# Altium PCB Power_meter.PCBDOC (part 1 of 2)
Units mm, origin at the board's own origin, x right, y up, seen from the top; angles counter-clockwise.
Board outline 21.4 x 72.8 mm, 2 copper layers (Top, Bot), stack 1.621 mm thick; 101 components, 79 nets, 320 pads, 151 vias.
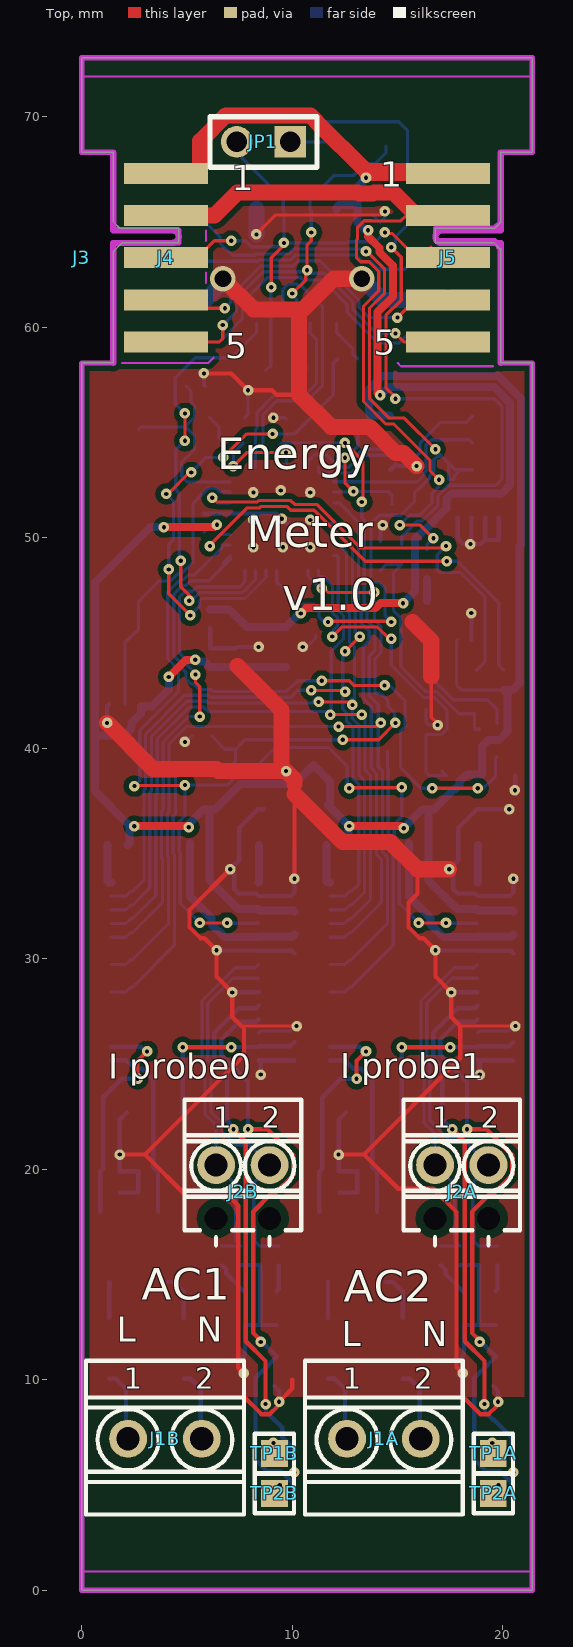
[diagram p0: Top view]
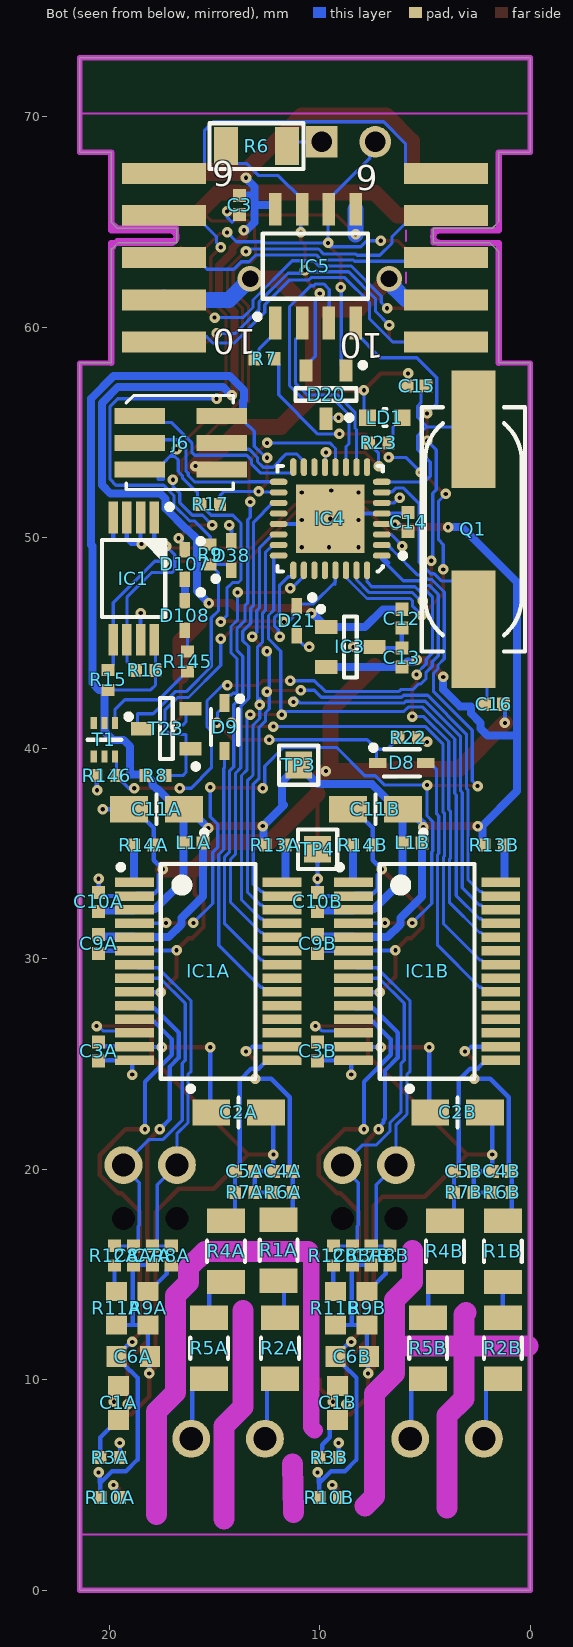
[diagram p1: Bot view, seen from below]
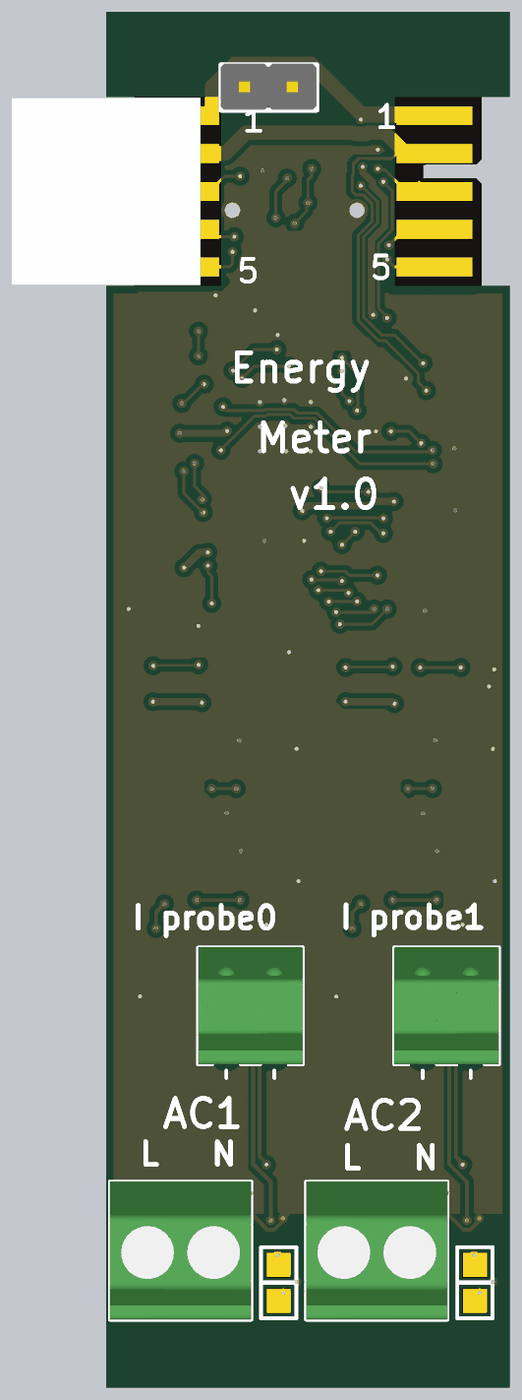
[diagram p3: 3D render of the assembled board from above, using the file's embedded part models]
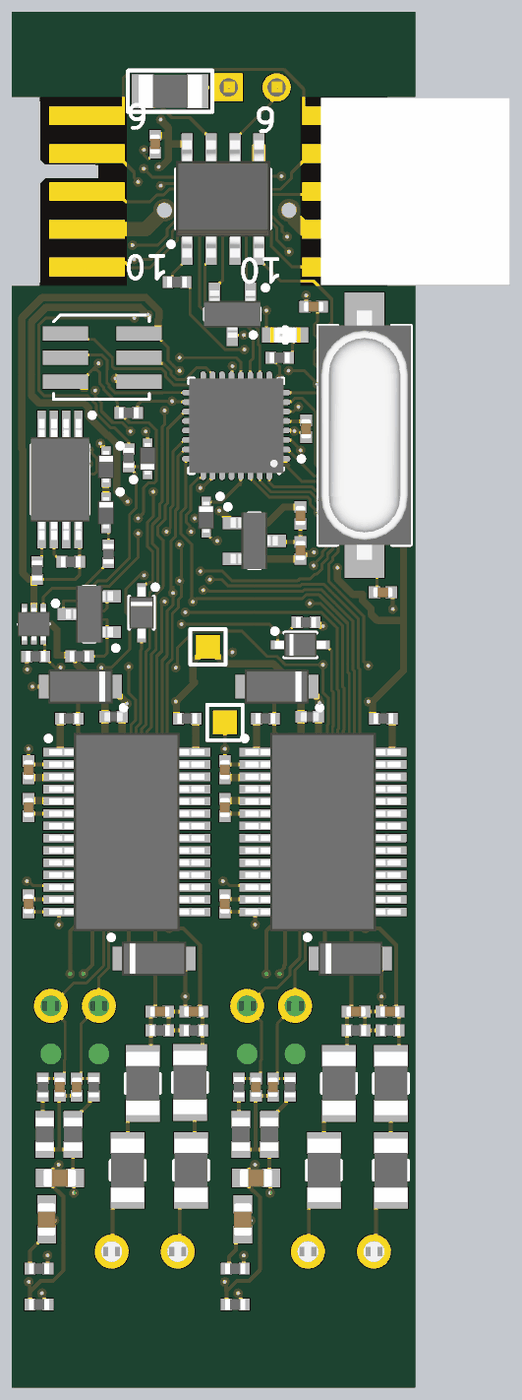
[diagram p4: 3D render of the assembled board from below, using the file's embedded part models]

## Layer stack, top to bottom
TopSolder: solder mask 0.0102, Solder Resist, Dk 3.5
Top: signal copper 0.0356
Dielectric1: core 1.55, FR-4, Dk 4.8
Bot: signal copper 0.0356
BottomSolder: solder mask 0.0102, Solder Resist, Dk 3.5

## Board outline
0,0 0,0.15 0,43.8 0,58.3 1.5,58.3 1.5,63.6 1.9,64 4.6,64 4.6,64.7 1.8,64.7 1.5,65 1.5,68.3 0,68.3 0,72.8 21.4,72.8 21.4,68.3 19.9,68.3 19.9,65 19.6,64.7 16.8,64.7 16.8,64 19.6,64 19.8,63.8 19.9,63.7 19.9,58.3 21.4,58.3 21.4,0

## Design rules (kind name [scope] priority, off if disabled: settings)
Clearance Clearance_DIFF [(InDifferentialPairClass('All Differential Pairs'))] p1: gap=0.127 ignorepadtopadclearanceinfootprint=FALSE except(0: Arc-Hole Track-Hole SMDPad-Hole THPad-Hole Via-Hole Fill-Hole Poly-Hole Region-Hole Text-Hole; 0.254: Arc-Poly Track-Poly SMDPad-Poly THPad-Poly Via-Poly Fill-Poly Poly-Poly Poly-Region Poly-Text)
Clearance [All] p2: gap=0.127 ignorepadtopadclearanceinfootprint=FALSE except(0: Arc-Hole Track-Hole SMDPad-Hole THPad-Hole Via-Hole Fill-Hole Poly-Hole Region-Hole Text-Hole; 0.254: Arc-Poly Track-Poly SMDPad-Poly Via-Poly; 0.381: THPad-Poly Fill-Poly Poly-Poly)
DiffPairsRouting [All] p1: maxlimit=0.254 minlimit=0.127 mostfreqgap=0.127 toplayer_minwidth=0.127 toplayer_maxwidth=0.381 toplayer_prefwidth=0.254 bottomlayer_minwidth=0.127 bottomlayer_maxwidth=0.381 bottomlayer_prefwidth=0.254 maxuncoupledlength=12.7
FabricationTestPointUsage TestPointUsage [All] p1: valid=0 allowmultiple=FALSE
FabricationTestpoint Testpoint [All] p1: side=3 testpointundercomponent=TRUE minsize=1.016 maxsize=2.54 preferedsize=1.524 minholesize=0.508 maxholesize=1.016 preferedholesize=0.813 testpointgrid=0.025 allowsidetop=TRUE allowsidebottom=TRUE usegrid=TRUE gridtolerance=0
HoleSize [All] p1: absolutevalues=TRUE maxlimit=3.81 minlimit=0.025 maxpercent=80.000 minpercent=20.000
HoleToHoleClearance [All] p1: gap=0.025 allowstackedmicrovias=TRUE
MinimumSolderMaskSliver [All] p1: minsoldermaskwidth=0
PlaneClearance [All] p1: clearance=0.254
PlaneConnect [All] p1: planeconnectstyle=Direct reliefexpansion=0.508 reliefentries=4 reliefconductorwidth=0.254 reliefairgap=0.254
PolygonConnect PolygonConnect_pad [(InPadClass('All Pads'))] p1: connectstyle=Relief reliefconductorwidth=0.254 reliefentries=4 polygonreliefangle="90 Angle" airgapwidth=0.254
PolygonConnect [All] p2: connectstyle=Direct reliefconductorwidth=0.254 reliefentries=4 polygonreliefangle="45 Angle" airgapwidth=0.254
RoomDefinition Power_meter [InComponentClass('Power_meter')] p1 off: confinementstyle=ConfineIn formatcopy=TRUE lockcomponents=FALSE outline 0.8,48.9 22,48.9 22,73.1 0.8,73.1
RoomDefinition U_Meas_Channel2 [InComponentClass('U_Meas_Channel2')] p2 off: confinementstyle=ConfineIn formatcopy=TRUE lockcomponents=FALSE outline 0.15,3.4 10.55,3.4 10.55,38.4 0.15,38.4
RoomDefinition U_Meas_Channel1 [InComponentClass('U_Meas_Channel1')] p3 off: confinementstyle=ConfineIn formatcopy=TRUE lockcomponents=FALSE outline 10.55,3.4 20.95,3.4 20.95,38.4 10.55,38.4
RoutingVias [All] p1: holewidth=0.2 width=0.5 viastyle="Through Hole" minholewidth=0.2 minwidth=0.5 maxholewidth=1 maxwidth=2
SilkToSilkClearance [All] p1: silktosilkclearance=0
SilkToSolderMaskClearance SilkscreenOverComponentPads [IsPad] p1: minsilkscreentomaskgap=0 clearancetoexposedcopper=TRUE
SolderMaskExpansion [All] p1: expansion=0.051
Width [All] p1: maxlimit=1.27 minlimit=0.127 preferedwidth=0.127
20 further rules are at their usual default settings.

## Classes and differential pairs
channel class Meas_Channel: U_Meas_Channel1 U_Meas_Channel2
component class U_Meas_Channel2: C1B C2B C3B C4B C5B C6B C7B C8B C9B C10B C11B IC1B J1B J2B L1B R1B R2B R3B R4B R5B R6B R7B R8B R9B R10B R11B R12B R13B R14B TP1B TP2B
component class U_Meas_Channel1: C1A C2A C3A C4A C5A C6A C7A C8A C9A C10A C11A IC1A J1A J2A L1A R1A R2A R3A R4A R5A R6A R7A R8A R9A R10A R11A R12A R13A R14A TP1A TP2A
component class Power_meter: C3 C12 C13 C14 C15 C16 D8 D9 D20 D21 D38 D107 D108 IC1 IC3 IC4 IC5 IC8 IC9 IC10 IC11 J3 J4 J5 J6 JP1 LD1 Q1 R6 R7 R8 R9 R15 R16 R17 R22 R23 R24 R145 R146 T1 T23 TP3 TP4

## Components (designator, comment, footprint, x,y, rotation, side; value= is the part's Value field where it differs from the comment)
C1A "330nF" CAPC1608X87N 19.55,8.9 r270 bottom (schematic designator C1)
C1B "330nF" CAPC1608X87N 9.15,8.9 r270 bottom (schematic designator C1)
C2A "10uF" CAPMP3216X180N 13.85,22.7 r180 bottom (schematic designator C2)
C2B "10uF" CAPMP3216X180N 3.45,22.7 r180 bottom (schematic designator C2)
C3 "100nF" CAPC1005X55N 13.8,65.8 r270 bottom
C3A "100nF" CAPC1005X55N 20.5,25.6 r90 bottom (schematic designator C3)
C3B "100nF" CAPC1005X55N 10.1,25.6 r90 bottom (schematic designator C3)
C4A "33nF" CAPC1005X55N 11.75,19.9 r180 bottom (schematic designator C4)
C4B "33nF" CAPC1005X55N 1.35,19.9 r180 bottom (schematic designator C4)
C5A "33nF" CAPC1005X55N 13.55,19.9 r0 bottom (schematic designator C5)
C5B "33nF" CAPC1005X55N 3.15,19.9 r0 bottom (schematic designator C5)
C6A "330nF" CAPC1608X87N 18.85,11.1 r180 bottom (schematic designator C6)
C6B "330nF" CAPC1608X87N 8.45,11.1 r180 bottom (schematic designator C6)
C7A "33nF" CAPC1005X55N 17.95,15.9 r90 bottom (schematic designator C7)
C7B "33nF" CAPC1005X55N 7.55,15.9 r90 bottom (schematic designator C7)
C8A "33nF" CAPC1005X55N 18.85,15.9 r270 bottom (schematic designator C8)
C8B "33nF" CAPC1005X55N 8.45,15.9 r270 bottom (schematic designator C8)
C9A "100nF" CAPC1005X55N 20.5,30.7 r90 bottom (schematic designator C9)
C9B "100nF" CAPC1005X55N 10.1,30.7 r90 bottom (schematic designator C9)
C10A "100nF" CAPC1005X55N 20.5,32.7 r90 bottom (schematic designator C10)
C10B "100nF" CAPC1005X55N 10.1,32.7 r90 bottom (schematic designator C10)
C11A "10uF" CAPMP3216X180N 17.75,37.1 r0 bottom (schematic designator C11)
C11B "10uF" CAPMP3216X180N 7.35,37.1 r0 bottom (schematic designator C11)
C12 "1uF" CAPC1005X55N 6.1,46.15 r90 bottom
C13 "1uF" CAPC1005X55N 6.1,44.3 r270 bottom
C14 "100nF" CAPC1005X55N 5.8,50.738 r270 bottom
C15 "18pF" CAPC1005X55N 5.4,57.2 r180 bottom
C16 "18pF" CAPC1005X55N 1.727,42.088 r0 bottom
D8 "1N4148WS" SODFL2512X100N 6.1,39.3 r180 bottom
D9 "1N4148WS" SODFL2512X100N 14.518,41.005 r270 bottom
D20 "SM712" SOT95P237X112-3N 9.7,56.8 r270 bottom
D21 "PESD3V3S1UB" SODFL1608X65N 11.1,46.059 r270 bottom
D38 "PESD3V3S1UB" SODFL1608X65N 14.192,49.15 r90 bottom
D107 "PESD3V3S1UB" SODFL1608X65N 16.4,48.73 r270 bottom
D108 "PESD3V3S1UB" SODFL1608X65N 16.4,46.3 r270 bottom
IC1 "M24256-BRDW6" SOP65P640X120-8N 18.833,48.058 r270 bottom
IC1A "ATM90E26-YU" SOP65P780X200-28N 15.3,29.4 r180 bottom (schematic designator IC1)
IC1B "ATM90E26-YU" SOP65P780X200-28N 4.9,29.4 r180 bottom (schematic designator IC1)
IC3 "AP7313-33SAG-7" SOT95P240X130-3N 8.539,44.809 r180 bottom
IC4 "ATMEGA328PB-MU" QFN50P500X500X100-33N-S325 9.5,50.9 r0 bottom
IC5 "ST485ECDR" SOIC127P600X175-8N 10.2,62.9 r90 bottom
J1A "Family" PHOENIX_1751248 14.35,7.2 r0 top (schematic designator J1)
J1B "Family" PHOENIX_1751248 3.95,7.2 r0 top (schematic designator J1)
J2A "Family" PHOENIX_1725656 18.05,20.2 r0 top (schematic designator J2)
J2B "Family" PHOENIX_1725656 7.65,20.2 r0 top (schematic designator J2)
J3 "=Family" "AVX_00 9159 010 061 916" 0,63.3 r180 top
J4 "=Family" EDGE10T1B6_P200W1000L0F100X400 4,67.3 r270 top locked
J5 "=Family" EDGE10T5B10_P200W1000L0F100X400 17.4,59.3 r90 top locked
J6 "ZL322-2X3P or PLHTD6S-TR-CV" ZL322-2X3P 16.6,54.5 r270 bottom
JP1 "1798942 (goldpin 2x 2.54)" jump 9.9,68.8 r270 top
L1A "220R@100MHz" INDC1005X55N 16,35.5 r180 bottom (schematic designator L1)
L1B "220R@100MHz" INDC1005X55N 5.6,35.5 r180 bottom (schematic designator L1)
LD1 "Green" LED_KINGBRIGHT_KPH-1608CGCK 6.9,55.7 r180 bottom
Q1 "8.192MHz" XTAL_ABRACON_ABLS 2.7,50.4 r270 bottom
R1A "470k" RESC3216X65N 11.95,16.15 r270 bottom (schematic designator R1)
R1B "470k" RESC3216X65N 1.3,16.1 r270 bottom (schematic designator R1)
R2A "470k" RESC3216X65N 11.889,11.5 r270 bottom (schematic designator R2)
R2B "470k" RESC3216X65N 1.3,11.5 r270 bottom (schematic designator R2)
R3A "100" RESC1005X40N 19.95,6.3 r0 bottom (schematic designator R3)
R3B "100" RESC1005X40N 9.55,6.3 r0 bottom (schematic designator R3)
R4A "470k" RESC3216X65N 14.45,16.1 r270 bottom (schematic designator R4)
R4B "470k" RESC3216X65N 4.05,16.1 r270 bottom (schematic designator R4)
R5A "470k" RESC3216X65N 15.25,11.5 r270 bottom (schematic designator R5)
R5B "470k" RESC3216X65N 4.85,11.5 r270 bottom (schematic designator R5)
R6 "120R" 1206R 13,68.6 r180 bottom
R6A "1k" RESC1005X40N 11.75,18.9 r180 bottom (schematic designator R6)
R6B "1k" RESC1005X40N 1.35,18.9 r180 bottom (schematic designator R6)
R7 "1k" RESC1005X40N 12.632,58.5 r0 bottom
R7A "1k" RESC1005X40N 13.55,18.9 r0 bottom (schematic designator R7)
R7B "1k" RESC1005X40N 3.15,18.9 r0 bottom (schematic designator R7)
R8 "100k" RESC1005X40N 17.8,38.7 r0 bottom
R8A "1k" RESC1005X40N 17.05,15.9 r270 bottom (schematic designator R8)
R8B "1k" RESC1005X40N 6.65,15.9 r270 bottom (schematic designator R8)
R9 "49R9" RESC1005X40N 15.2,49.2 r270 bottom
R9A "2R4" RESC1608X55N 18.15,13.4 r90 bottom (schematic designator R9)
R9B "2R4" RESC1608X55N 7.75,13.4 r90 bottom (schematic designator R9)
R10A "100" RESC1005X40N 19.95,4.4 r0 bottom (schematic designator R10)
R10B "100" RESC1005X40N 9.55,4.4 r0 bottom (schematic designator R10)
R11A "2R4" RESC1608X55N 19.65,13.4 r270 bottom (schematic designator R11)
R11B "2R4" RESC1608X55N 9.25,13.4 r270 bottom (schematic designator R11)
R12A "1k" RESC1005X40N 19.75,15.9 r270 bottom (schematic designator R12)
R12B "1k" RESC1005X40N 9.35,15.9 r270 bottom (schematic designator R12)
R13A "0" RESC1005X40N 12.1,35.4 r0 bottom (schematic designator R13)
R13B "0" RESC1005X40N 1.7,35.4 r0 bottom (schematic designator R13)
R14A "0" RESC1005X40N 18.35,35.4 r180 bottom (schematic designator R14)
R14B "0" RESC1005X40N 7.95,35.4 r180 bottom (schematic designator R14)
R15 "10k" RESC1005X40N 20.05,43.24 r90 bottom
R16 "10k" RESC1005X40N 18.27,43.7 r0 bottom
R17 "10k" RESC1005X40N 15.2,51.579 r0 bottom
R22 "10k" RESC1005X40N 5.8,40.5 r180 bottom
R23 "10k" RESC1005X40N 7.2,54.5 r180 bottom
R145 "1k" RESC1005X40N 16.275,44.118 r90 bottom
R146 "10k" RESC1005X40N 20.125,38.694 r180 bottom
T1 "BC857BV" SOTFL50P160X60-6N 20.225,40.4 r270 bottom
T23 "BSS138LT1G" SOT95P240X110-3N 17.283,40.931 r0 bottom
TP1A "Test Point" TPS127 19.55,6.5 r90 top (schematic designator TP1)
TP1B "Test Point" TPS127 9.15,6.5 r90 top (schematic designator TP1)
TP2A "Test Point" TPS127 19.55,4.6 r90 top (schematic designator TP2)
TP2B "Test Point" TPS127 9.15,4.6 r90 top (schematic designator TP2)
TP3 "Test Point" TPS127 11,39.2 r270 bottom
TP4 "Test Point" TPS127 10.1,35.2 r270 bottom

## Footprints (in the part's own frame and the unit in brackets; to place one, negate y for a bottom-side part, rotate by r counter-clockwise, add the part's x,y. Pads: shape width x height; smd on the part's side, far side on the other; paste and mask are expansions set on the pad)
1206R [mm]
  rect 1.15x1.8 smd: 1(-1.45,0) 2(1.45,0)
  silkscreen extent -2.24,-1.09 2.24,1.09, body extent -1.67,-0.87 1.68,0.88, height 0.65
"AVX_00 9159 010 061 916" [mm] "10 Contacts, 2mm Pitch, Open Ended Card Edge Connector, 9159 Series"
  body extent -5,-4.95 5,4.95, height 1.7
CAPC1005X55N [mm] "Chip Capacitor, Body 1.0x0.55mm, IPC Medium Density"
  rect 0.62x0.62 smd: 1(-0.45,0) 2(0.45,0)
  body extent -0.52,-0.27 0.53,0.28, height 0.55
CAPC1608X87N [mm] "Chip Capacitor, Body 1.6x0.8mm IPC Medium Density"
  rect 0.95x1 smd: 1(-0.8,0) 2(0.8,0)
  body extent -0.87,-0.47 0.88,0.48, height 0.87
CAPMP3216X180N [mm] "Capacitor, Polarized, Molded  Body 3.2x1.6mm, IPC Medium Density"
  rect 1.8x1.25 smd: 1(-1.3,0) 2(1.3,0)
  silkscreen extent -2.4,-0.7 0,1.25, body extent -1.7,-0.9 1.7,0.9, height 1.6
EDGE10T1B6_P200W1000L0F100X400 [mm] "10 contacts Board Edge Connector, First Left Top Pad 1, First Left Bottom Pad 2, Pitch 2mm, Length 0mm, Width 10mm, Finger Lenght 4mm, Finger Width 1mm"
  rect 1x4 smd paste-0.5: 1(0,0) 2(2,0) 3(4,0) 4(6,0) 5(8,0)
  rect 1x4 smd far side paste-0.5: 6(0,0) 7(2,0) 8(4,0) 9(6,0) 10(8,0)
  KeepOutLayer lines w0.3: 9,-2.5 3.3,-2.5 3.3,0.3 ccw(c3,0.3) 2.7,0.3 2.7,-2.5 -1,-2.5
EDGE10T5B10_P200W1000L0F100X400 [mm] "10 contacts Board Edge Connector, First Left Top Pad 5, First Left Bottom Pad 10, Pitch 2mm, Length 0mm, Width 10mm, Finger Lenght 4mm, Finger Width 1mm"
  rect 1x4 smd paste-0.5: 1(8,0) 2(6,0) 3(4,0) 4(2,0) 5(0,0)
  rect 1x4 smd far side paste-0.5: 6(8,0) 7(6,0) 8(4,0) 9(2,0) 10(0,0)
  KeepOutLayer lines w0.3: -1,-2.5 4.7,-2.5 4.7,0.3 cw(c5,0.3) 5.3,0.3 5.3,-2.5 9,-2.5
INDC1005X55N [mm] "Chip Inductor, 2-Leads, EIA 0402, Metric 1005, Body 1x0.5mm, 0402IPC Medium Density"
  rect 0.6x0.62 smd: 1(-0.46,0) 2(0.46,0)
  body extent -0.52,-0.27 0.53,0.28, height 0.55
jump [mm]
  rect 1.5x1.5 hole 0.965: 1(0,0)
  round 1.5 hole 0.965: 2(0,-2.54)
  silkscreen extent -1.2,-3.81 1.2,1.27, body extent -1.26,-3.84 1.19,1.24, height 8
LED_KINGBRIGHT_KPH-1608CGCK [mm] "SMT Green LED, Case 0603, Body L 1.6 x W 0.8mm H 0.65mm"
  rect 0.8x0.8 smd: 1(-0.825,0) 2(0.825,0)
  silkscreen extent -1.83,-0.4 0.08,0.4, body extent -0.8,-0.4 0.8,0.4, height 0.65
PHOENIX_1725656 [mm] "Micro PCB Terminal Block, Pitch 2.54mm, 2 Positions, Screw Connection"
  round 1.8 hole 1.1: 1(-1.27,0) 2(1.27,0)
  round 0.5 hole 1.1 unplated mask+0.3: 3(-1.27,-2.54) 4(1.27,-2.54)
  silkscreen extent -2.77,-3.81 2.77,3.1, body extent -2.77,-3.1 2.77,3.1, height 8.5
PHOENIX_1751248 [mm] "Terminal Block, 10A 160V, Pitch 3.5mm, 2 Positions, Screw Connection"
  round 1.8 hole 1.1: 1(-1.75,0) 2(1.75,0)
  silkscreen extent -3.75,-3.6 3.75,3.7, body extent -3.75,-3.6 3.75,3.7, height 8.5
QFN50P500X500X100-33N-S325 [mm] "QFN, (MO-220-VHHD-4) 0.50mm pitch,square; 8 pin X 8 pin, 5mm X 5mm X 1.00mm H body (w/thermal tab 3.25 X 3.25mm),  IPC Medium Density"
  oval 0.85x0.3 smd: 1(-2.45,1.75) 2(-2.45,1.25) 3(-2.45,0.75) 4(-2.45,0.25) 5(-2.45,-0.25) 6(-2.45,-0.75) 7(-2.45,-1.25) 8(-2.45,-1.75) 17(2.45,-1.75) 18(2.45,-1.25) 19(2.45,-0.75) 20(2.45,-0.25) 21(2.45,0.25) 22(2.45,0.75) 23(2.45,1.25) 24(2.45,1.75)
  oval 0.3x0.85 smd: 9(-1.75,-2.45) 10(-1.25,-2.45) 11(-0.75,-2.45) 12(-0.25,-2.45) 13(0.25,-2.45) 14(0.75,-2.45) 15(1.25,-2.45) 16(1.75,-2.45) 25(1.75,2.45) 26(1.25,2.45) 27(0.75,2.45) 28(0.25,2.45) 29(-0.25,2.45) 30(-0.75,2.45) 31(-1.25,2.45) 32(-1.75,2.45)
  rect 3.25x3.25 smd: 33(0,0)
  silkscreen extent -3.57,-2.5 2.5,2.5, body extent -2.5,-2.5 2.5,2.5, height 1
RESC1005X40N [mm] "Chip Resistor, EIA 0402, Metric 1005, Body 1.0x0.5mm, IPC Medium Density"
  rect 0.58x0.62 smd: 1(-0.47,0) 2(0.47,0)
  body extent -0.52,-0.27 0.53,0.28, height 0.4
RESC1608X55N [mm] "Chip Resistor, EIA 0603, Metric 1608, Body 1.6x0.8mm, IPC Medium Density"
  rect 0.9x1 smd: 1(-0.8,0) 2(0.8,0)
  body extent -0.87,-0.47 0.88,0.48, height 0.55
RESC3216X65N [mm] "Chip Resistor, EIA 1206, Metric 3216, Body 3.2x1.6mm, IPC Medium Density"
  rect 1.15x1.8 smd: 1(-1.45,0) 2(1.45,0)
  silkscreen extent -0.5,-0.9 0.5,0.9, body extent -1.67,-0.87 1.68,0.88, height 0.65
SODFL1608X65N [mm] "Ultra Small Outline Diode Flat Lead (SOD-523), Body; 1.2mm L X 0.8mm W X 0.65mm H, IPC Medium Density"
  rect 0.75x0.5 smd: 1(-0.7,0) 2(0.7,0)
  silkscreen extent -1.22,0.63 -0.98,0.87, body extent -0.82,-0.42 0.83,0.43, height 0.65
SODFL2512X100N [mm] "SODFL Diode; 1.70mm W X 1.25mm L X 1.00mm H body, IPC Medium Density"
  rect 0.84x0.46 smd: 1(-1.14,0) 2(1.14,0)
  silkscreen extent -1.48,-0.65 0.85,0.85, body extent -1.35,-0.65 1.35,0.65, height 1
SOIC127P600X175-8N [mm] "SOIC 8, Pitch 1.27mm - Body 4x5mm, IPC Medium Density"
  rect 1.55x0.6 smd: 1(-2.7,1.905) 2(-2.7,0.635) 3(-2.7,-0.635) 4(-2.7,-1.905) 5(2.7,-1.905) 6(2.7,-0.635) 7(2.7,0.635) 8(2.7,1.905)
  silkscreen extent -2.52,-2.5 1.55,2.88, body extent -3.1,-2.5 3.1,2.5, height 1.75
SOP65P640X120-8N [mm] "SOP, 0.65mm pitch; 8 pin, 4.40mm W X 3.00mm L X 1.20mm H body, IPC Medium Density"
  rect 1.5x0.45 smd: 1(-2.9,0.975) 2(-2.9,0.325) 3(-2.9,-0.325) 4(-2.9,-0.975) 5(2.9,-0.975) 6(2.9,-0.325) 7(2.9,0.325) 8(2.9,0.975)
  silkscreen extent -3.52,-1.5 1.83,1.82, body extent -3.2,-1.55 3.2,1.55, height 1.2
SOP65P780X200-28N [mm] "SOP, 0.65mm Pitch; 28 Pin, 5.30mm W X 10.20mm L X 2.00mm H Body, IPC Medium Density"
  rect 1.85x0.45 smd: 1(-3.5,4.225) 2(-3.5,3.575) 3(-3.5,2.925) 4(-3.5,2.275) 5(-3.5,1.625) 6(-3.5,0.975) 7(-3.5,0.325) 8(-3.5,-0.325) 9(-3.5,-0.975) 10(-3.5,-1.625) 11(-3.5,-2.275) 12(-3.5,-2.925) 13(-3.5,-3.575) 14(-3.5,-4.225) 15(3.5,-4.225) 16(3.5,-3.575) 17(3.5,-2.925) 18(3.5,-2.275) 19(3.5,-1.625) 20(3.5,-0.975) 21(3.5,-0.325) 22(3.5,0.325) 23(3.5,0.975) 24(3.5,1.625) 25(3.5,2.275) 26(3.5,2.925) 27(3.5,3.575) 28(3.5,4.225)
  silkscreen extent -4.28,-5.1 2.25,5.1, body extent -4.11,-5.25 4.11,5.25, height 2
SOT95P237X112-3N [mm] "SOT, 0.95mm, pitch; 3 pin,1.30mm W X 2.92mm L X 1.12mm H body, IPC Medium Density"
  rect 1.05x0.6 smd: 1(-1.15,0.95) 2(-1.15,-0.95) 3(1.15,0)
  silkscreen extent -1.52,-1.45 0.3,1.87, body extent -1.25,-1.5 1.25,1.5, height 1.1
SOT95P240X110-3N [mm] "SOT23 3-Leads, Pitch 0.95mm, Body 1.3x2.9mm, IPC Medium Density"
  rect 1.05x0.65 smd: 1(-1.15,0.95) 2(-1.15,-0.95) 3(1.15,0)
  silkscreen extent -1.52,-1.45 0.3,1.92, body extent -1.25,-1.5 1.25,1.5, height 1.1
SOT95P240X130-3N [mm] "SOT23 3-Leads, Pitch 0.95mm - Body 1.3x2.9mm, IPC Medium Density"
  rect 1.05x0.65 smd: 1(-1.15,0.95) 2(-1.15,-0.95) 3(1.15,0)
  silkscreen extent -1.53,-1.45 0.3,1.92, body extent -1.25,-1.5 1.25,1.5, height 1.3
SOTFL50P160X60-6N [mm] "SOTFL (SOT666), 0.50mm, Pitch; 6 Pin, 1.20mm W X 1.60mm L X 0.60mm H Body, IPC Medium Density"
  rect 0.57x0.3 smd: 1(-0.79,0.5) 2(-0.79,0) 3(-0.79,-0.5) 4(0.79,-0.5) 5(0.79,0) 6(0.79,0.5)
  silkscreen extent -1.22,-0.8 0,1.27, body extent -0.85,-0.85 0.85,0.85, height 0.6
TPS127 [mm] "1.27 x  1.27mm SMD Test Point Area"
  rect 1.27x1.27 smd paste-1.27: 1(0,0)
  silkscreen extent -0.94,-0.94 0.94,0.94
XTAL_ABRACON_ABLS [mm] "HC/49US (AT49) SMD Cristal, Body 11.4x4.7mm, ABLS Serie"
  rect 5.6x2.1 smd: 1(-4.75,0) 2(4.75,0)
  silkscreen extent -5.8,-2.45 5.8,2.45, body extent -6.6,-2.45 6.6,2.45, height 4.2
ZL322-2X3P [mm] "SMT 1.27 mm dual goldpin"
  rect 0.76x2.4 smd: 1(-1.27,-1.95) 2(-1.27,1.95) 3(0,-1.95) 4(0,1.95) 5(1.27,-1.95) 6(1.27,1.95)
  silkscreen extent -2.25,-2.58 2.2,2.5, body extent -2.05,-2.15 2.03,2.15, height 4.5

## Part data
C1A C1B C6A C6B: library part CC0603_330NF_16V_10%_X5R, "Non-polarised capacitor", Case=0603, Manufacturer=GENERIC, Manufacturer1 ComponentHeight=0.87mm, Manufacturer1 Example=PHYCOMP, Manufacturer1 Part Number=223878613656, Tolerance=±10%, Voltage=16V, Author="CERN DEM JLC", Component Type=Standard, CreateDate=03.12.2007, HelpURL=\\cern.ch\dfs\Applications\Altium\Datasheets\CC0805_X5R_PHYCOMP_HC.pdf, LatestRevisionDate=03.12.2007, Manufacturer Part Number=CC0603_330NF_16V_10%_X5R, Mounted=Yes, Part Description="SMD Multilayer Chip Ceramic Capacitor", Part Number=CC0603_330NF_16V_10%_X5R, Pin Count=2, Sense=No, SMD=Yes, Socket=No, Status=Preferred, TC=X5R
C2A C2B C11A C11B: library part CTE3216-18_10UF_16V_20%_AVX_TCJ, "Polarised capacitor", Case=A, Manufacturer=AVX, Manufacturer Part Number=TCJA106M016R0200, Tolerance=±20%, Voltage=16V, Author="CERN DEM JLC", ComponentHeight=1.8mm, Component Type=Standard, CreateDate=29.03.2012, HelpURL=\\cern.ch\dfs\Applications\Altium\Datasheets\CTE_AVX_TCJ.pdf, LatestRevisionDate=29.03.2012, Mounted=Yes, Part Description="ESR 0R200 Tantalum Solid Electrolytic Chip Capacitor with Conductive Polymer Electrode", Part Number=CTE3216-18_10UF_16V_20%_AVX_TCJ, Pin Count=2, Sense=No, SMD=Yes, Socket=No, Status=Preferred
C3: library part CC0402_100NF_16V_10%_X7R, "Non-polarised capacitor", Case=0402, Manufacturer=GENERIC, Manufacturer1 ComponentHeight=0.55mm, Manufacturer1 Example=MURATA, Manufacturer1 Part Number=GRM155R71C104KA88D, Tolerance=±10%, Voltage=16V, Author="CERN DEM JLC", Component Type=Standard, CreateDate=05.12.2013, HelpURL=\\cern.ch\dfs\Applications\Altium\Datasheets\CC0402_X7R_MURATA_GRM.pdf, LatestRevisionDate=03.12.2007, Manufacturer Part Number=CC0402_100NF_16V_10%_X7R, Mounted=Yes, Part Description="SMD Multilayer Chip Ceramic Capacitor", Part Number=CC0402_100NF_16V_10%_X7R, Pin Count=2, Sense=No, SMD=Yes, Socket=No, Status="Not Recommended", TC=X7R
C3A C3B C9A C9B C10A C10B C14: library part CC0402_100NF_16V_10%_X5R, "Non-polarised capacitor", Case=0402, Manufacturer=GENERIC, Manufacturer1 ComponentHeight=0.55mm, Manufacturer1 Example=MURATA, Manufacturer1 Part Number=GRM155R61C104KA88D, Tolerance=±10%, Voltage=16V, Author="CERN DEM JLC", Component Type=Standard, CreateDate=10.12.2013, HelpURL=\\cern.ch\dfs\Applications\Altium\Datasheets\CC0402_X5R_MURATA_GRM.pdf, LatestRevisionDate=10.12.2013, Manufacturer Part Number=CC0402_100NF_16V_10%_X5R, Mounted=Yes, Part Description="SMD Multilayer Chip Ceramic Capacitor", Part Number=CC0402_100NF_16V_10%_X5R, Pin Count=2, Sense=No, SMD=Yes, Socket=No, Status=None, TC=X5R
C4A C4B C5A C5B C7A C7B C8A C8B: library part CC0402_33NF_16V_10%_X7R, "Non-polarised capacitor", Case=0402, Manufacturer=GENERIC, Manufacturer1 ComponentHeight=0.55mm, Manufacturer1 Example=PHYCOMP, Manufacturer1 Part Number=223878715643, Tolerance=±10%, Voltage=16V, Author="CERN DEM JLC", Component Type=Standard, CreateDate=03.12.2007, HelpURL=\\cern.ch\dfs\Applications\Altium\Datasheets\CC0402_X7R_PHYCOMP.pdf, LatestRevisionDate=03.12.2007, Manufacturer Part Number=CC0402_33NF_16V_10%_X7R, Mounted=Yes, Part Description="SMD Multilayer Chip Ceramic Capacitor", Part Number=CC0402_33NF_16V_10%_X7R, Pin Count=2, Sense=No, SMD=Yes, Socket=No, Status="Not Recommended", TC=X7R
C12 C13: library part CC0402_1UF_16V_10%_X5R, "Non-polarised capacitor", Case=0402, Manufacturer=GENERIC, Manufacturer1 ComponentHeight=0.55mm, Manufacturer1 Example=TDK, Manufacturer1 Part Number=C1005X5R1C105KT, Tolerance=±10%, Voltage=16V, Author="CERN DEM JLC", Component Type=Standard, CreateDate=25.10.2012, HelpURL=\\cern.ch\dfs\Applications\Altium\Datasheets\CC0402_X5R_TDK_C.pdf, LatestRevisionDate=25.10.2012, Manufacturer Part Number=CC0402_1UF_16V_10%_X5R, Mounted=Yes, Part Description="SMD Multilayer Chip Ceramic Capacitor", Part Number=CC0402_1UF_16V_10%_X5R, Pin Count=2, Sense=No, SMD=Yes, Socket=No, Status=Preferred, TC=X5R
C15 C16: library part CC0402_18PF_50V_5%_C0G, "Non-polarised capacitor", Case=0402, Manufacturer=GENERIC, Manufacturer1 ComponentHeight=0.55mm, Manufacturer1 Example=KEMET, Manufacturer1 Part Number=C0402C180J5GACTU, Tolerance=±5%, Voltage=50V, Author="CERN DEM JLC", Component Type=Standard, CreateDate=04.10.2016, HelpURL="\\cern.ch\dfs\Applications\Altium\Datasheets\CC0805_C0G_KEMET_(Commercial Grade).pdf", LatestRevisionDate=04.10.2016, Manufacturer Part Number=CC0402_18PF_50V_5%_C0G, Mounted=Yes, Part Description="SMD Multilayer Chip Ceramic Capacitor", Part Number=CC0402_18PF_50V_5%_C0G, Pin Count=2, Sense=No, SMD=Yes, Socket=No, Status=Preferred, TC=C0G/NP0
D8 D9: "Diode", Case=SOD-323F, Manufacturer="FAIRCHILD SEMICONDUCTOR", Power=150mA, Voltage=75V, Author="CERN DEM JLC", Bonding=No, ComponentHeight=1mm, Component Type=Standard, CreateDate=12.05.2011, Device=1N4148WS, HelpURL=\\cern.ch\dfs\Applications\Altium\Datasheets\1N4148WS.pdf, LatestRevisionDate=12.05.2011, Manufacturer Part Number=1N4148WS, Mounted=Yes, PackageDescription="SODFL Diode; 1.70mm W X 1.25mm L X 1.00mm H body, IPC Medium Density", Part Description="Small Signal Diodes", Part Number=1N4148WS, Pin Count=2, PressFit=No, Sense=No, SMD=Yes, Socket=No
D20: "Asymmetrical TVS Diode for Extended Common-Mode RS-485", Case=SOT-23, Manufacturer=SEMTECH, Power=400W, Voltage=12V/-7V, Author="CERN DEM JLC", Bonding=No, ComponentHeight=1.12mm, Component Type=Standard, CreateDate=23.04.2012, Device=SM712, HelpURL=\\cern.ch\dfs\Applications\Altium\Datasheets\SM712.pdf, LatestRevisionDate=23.04.2012, Manufacturer Part Number=SM712, Mounted=Yes, PackageDescription="SOT, 0.95mm, pitch; 3 pin,1.30mm W X 2.92mm L X 1.12mm H body, IPC Medium Density", Part Description="Asymmetrical TVS Diode for Extended Common-Mode RS-485", Part Number=SM712, Pin Count=3, PressFit=No, Sense=No, SMD=Yes, Socket=No, Status=Obsolete
D21 D38 D107 D108: "ESD protection diode", Case=SOD523, Manufacturer="NXP SEMICONDUCTORS", Power=330W, Voltage=3V3, Author="CERN DEM JLC", Bonding=No, ComponentHeight=0.65mm, Component Type=Standard, CreateDate=29.11.2012, Device=PESD3V3S1UB, HelpURL=\\cern.ch\dfs\Applications\Altium\Datasheets\PESD3V3S1UB.pdf, LatestRevisionDate=29.11.2012, Manufacturer Part Number=PESD3V3S1UB, Mounted=Yes, PackageDescription="Ultra Small Outline Diode Flat Lead (SOD-523), Body; 1.2mm L X 0.8mm W X 0.65mm H, IPC Medium Density", Part Description="ESD protection diode (23kV)", Part Number=PESD3V3S1UB, Pin Count=2, PressFit=No, Sense=No, SMD=Yes, Socket=No
IC1: "256-Kbit Serial I²C Bus EEPROM", Case=TSSOP8, Manufacturer="ST MICROELECTRONICS", Part Number=M24256-BRDW6P, Author="CERN DEM MR", Bonding=No, ComponentHeight=1.2mm, Component Type=Standard, CreateDate=17.03.2016, Device=M24256-BRDW6, HelpURL=\\cern.ch\dfs\Applications\Altium\Datasheets\M24256-BRDW6P.pdf, LatestRevisionDate=17.03.2016, Manufacturer Part Number=M24256-BRDW6, Mounted=Yes, PackageDescription="SOP, 0.65mm pitch; 8 pin, 4.40mm W X 3.00mm L X 1.20mm H body, IPC Medium Density", Part Description="256-Kbit Serial I²C Bus EEPROM", Pin Count=8, PressFit=No, Sense=No, SMD=Yes, Socket=No
IC1A IC1B: "Single-Phase High-Performance Wide-Span, Energy Metering IC", Case=SSOP28, Manufacturer="MICROCHIP TECHNOLOGY", Author="CERN DEM MR", Bonding=No, ComponentHeight=2mm, Component Type=Standard, CreateDate=13.12.2017, Device=ATM90E26-YU, HelpURL=\\cern.ch\dfs\Applications\Altium\Datasheets\ATM90E26-YU.pdf, LatestRevisionDate=13.12.2017, Manufacturer Part Number=ATM90E26-YU, Mounted=Yes, PackageDescription="SOP, 0.65mm Pitch; 28 pin, 5.30mm W X 10.20mm L X 2.00mm H body, IPC Medium Density", Part Description="Single-Phase High-Performance Wide-Span, Energy Metering IC", Part Number=ATM90E26-YU, Pin Count=28, PressFit=No, Sense=No, SMD=Yes, Socket=No
IC3: "3-Terminal Regulator 1=IN 2=OUT 3=GND", Case=SOT23, Manufacturer="DIODES INCORPORATED", Author="CERN DEM JLC", Bonding=No, ComponentHeight=1.35mm, Component Type=Standard, CreateDate=20.03.2018, Device=AP7313-33SAG-7, HelpURL=\\cern.ch\dfs\Applications\Altium\Datasheets\AP7313-33SAG-7.pdf, LatestRevisionDate=20.03.2018, Manufacturer Part Number=AP7313-33SAG-7, Mounted=Yes, PackageDescription="SOT23 3-Leads, Pitch 0.95mm - Body 1.3x2.9mm, IPC Medium Density", Part Description="3.3V, 150mA Low Quiescent Current, Fast Transient Low Dropout Linear Regulator", Part Number=AP7313-33SAG-7, Pin Count=3, PressFit=No, Sense=No, SMD=Yes, Socket=No
IC4: "8-bit AVR 20MHz Microcontroller With 32K Bytes In-System  Programmable  Flash", Case=QFN32, Manufacturer=ATMEL, Author=GK, Bonding=No, ComponentHeight=1mm, Component Type=Standard, CreateDate=2011-02-08, Device=ATMEGA328PB-MU, HelpURL=\\cern.ch\dfs\Applications\Altium\Datasheets\ATMEGA328P-MU.pdf, LatestRevisionDate=2014-07-02, Manufacturer Part Number=ATMEGA328PB-MU, Mounted=Yes, PackageDescription="QFN, (MO-220-VHHD-2) 0.50mm pitch,square; 8 pin X 8 pin, 5mm X 5mm X 1.00mm H body (w/thermal tab 3.25 X 3.25mm),  IPC Medium Density", Part Description="8-bit AVR Microcontroller, 32KB Flash, 1KB EEPROM, 2KB SRAM, 32-pin MLF, Industrial Grade (-40°C to 85°C)", Part Number=ATMEGA328PB-MU, Pin Count=33, PressFit=No, Sense=No, SMD=Yes, Socket=No
IC5: "±15kV ESD-Protected, Low Power  RS-485/RS-422 Transceiver", Case=SOIC8, Manufacturer="ST MICROELECTRONICS", Author="CERN DEM MR", Bonding=No, ComponentHeight=1.75mm, Component Type=Standard, CreateDate=15.02.2018, Device=ST485ECDR, HelpURL=\\cern.ch\dfs\Applications\Altium\Datasheets\ST485ECDR.pdf, LatestRevisionDate=15.02.2018, Manufacturer Part Number=ST485ECDR, Mounted=Yes, PackageDescription="SOIC 8, Pitch 1.27mm - Body 4x5mm, IPC Medium Density", Part Description="±15kV ESD-Protected, Low Power  RS-485/RS-422 Transceiver", Part Number=ST485ECDR, Pin Count=8, PressFit=No, Sense=No, SMD=Yes, Socket=No
J1A J1B: library part PHOENIX_1751248, "Terminal Block, 2 Positions, Screw Connection", Manufacturer="PHOENIX CONTACT", Manufacturer Part Number="1751248 (MKDS 1/ 2-3,5)", Author="CERN DEM JLC", ComponentHeight=8.5mm, Component Type=Standard, CreateDate=03.11.2009, HelpURL=\\cern.ch\dfs\Applications\Altium\Datasheets\PHOENIX_1751248.pdf, LatestRevisionDate=26.04.2010, Mounted=Yes, Part Description="10A 160V, Terminal Block, Pitch 3.5mm, 2 Positions, Screw Connection", Part Number=PHOENIX_1751248, Pin Count=2, PressFit=No, Sense=No, SMD=No, Socket=No, Status=None
J2A J2B: library part PHOENIX_1725656, "Terminal Block, 2 Positions, Screw Connection", Manufacturer="PHOENIX CONTACT", Manufacturer Part Number="1725656 (MPT 0,5/2-2,54)", Author="CERN DEM JMW", ComponentHeight=8.5mm, Component Type=Standard, CreateDate=07.11.2008, HelpURL=\\cern.ch\dfs\Applications\Altium\Datasheets\PHOENIX_1725656.pdf, LatestRevisionDate=26.04.2010, Mounted=Yes, Part Description="6A, 63V, Terminal Block, Pitch 2.54mm, 2 Positions, Screw Connection", Part Number=PHOENIX_1725656, Pin Count=2, PressFit=No, Sense=No, SMD=No, Socket=No, Status=None
J3: library part "AVX_00 9159 010 061 916", "Open Ended Card Edge Connector, 9159 Series", Manufacturer=AVX, Manufacturer Part Number="00 9159 010 061 916", Author="CERN DEM MR", ComponentHeight=1.6mm, Component Type=Standard, CreateDate=13.02.2018, HelpURL="\\cern.ch\dfs\Applications\Altium\Datasheets\AVX_00 9159 010 061 916.pdf", LatestRevisionDate=13.02.2018, Mounted=Yes, Part Description="10 Contacts, 2mm Pitch, Open Ended Card Edge Connector, 9159 Series", Part Number="AVX_00 9159 010 061 916", Pin Count=10, PressFit=No, Sense=No, SMD=No, Socket=No, Status=None
J4: library part EDGE10T1B6_P200W1000L0F100X400, "PCB Edge Connector 10 (2x5)", Author="CERN DEM MR", ComponentHeight=0mm, Component Type="Standard (No BOM)", CreateDate=14.02.2018, HelpURL=\\cern.ch\dfs\Applications\Altium\Datasheets\EDGE10T1B6_P200W1000L0F100X400.pdf, LatestRevisionDate=14.02.2018, Mounted=No, Part Description="10 Contacts Board Edge Connector, Pitch 2mm, Length 0mm, Width 10mm, Finger Lenght 4mm, Finger Width 1mm", Part Number=EDGE10T1B6_P200W1000L0F100X400, Pin Count=10, PressFit=No, Sense=No, SMD=No, Socket=No, Status=None
J5: library part EDGE10T5B10_P200W1000L0F100X400, "PCB Edge Connector 10 (2x5)", Author="CERN DEM MR", ComponentHeight=0mm, Component Type="Standard (No BOM)", CreateDate=14.02.2018, HelpURL=\\cern.ch\dfs\Applications\Altium\Datasheets\EDGE10T5B10_P200W1000L0F100X400.pdf, LatestRevisionDate=14.02.2018, Mounted=No, Part Description="10 Contacts Board Edge Connector, Pitch 2mm, Length 0mm, Width 10mm, Finger Lenght 4mm, Finger Width 1mm", Part Number=EDGE10T5B10_P200W1000L0F100X400, Pin Count=10, PressFit=No, Sense=No, SMD=No, Socket=No, Status=None
J6: library part "CON_2x3 1.27 SMT Male", "1.27 mm dual row goldpin (Maritex)"
JP1: library part JUMPER, "Jumper", Supplier Part Number 1=1798942, Supplier 1=Farnell
L1A L1B: library part IND0402_MURATA_BLM15HB221SN1, "Inductor", Case=0402, Manufacturer=MURATA, Manufacturer Part Number=BLM15HB221SN1, Power=250mA, Resistance=1R, Tolerance=±25%, Author="CERN DEM JLC", ComponentHeight=0.55mm, Component Type=Standard, CreateDate=23.06.2009, HelpURL=\\cern.ch\dfs\Applications\Altium\Datasheets\IND0402_MURATA_BLM15H.pdf, LatestRevisionDate=23.06.2009, Mounted=Yes, Part Description="SMD EMIFIL Suppression Chip Ferrite Bead", Part Number=IND0402_MURATA_BLM15HB221SN1, Pin Count=2, Sense=No, SMD=Yes, Socket=No, Status=None
LD1: library part LED_KINGBRIGHT_KPH-1608CGCK, "LED Green 1C 2A", Manufacturer=KINGBRIGHT, Manufacturer Part Number=KPH-1608CGCK, Author="CERN DEM JLC", Bonding=No, Color=Green, ComponentHeight=0.65mm, Component Type=Standard, CreateDate=03.07.2017, HelpURL=\\cern.ch\dfs\Applications\Altium\Datasheets\LED_KINGBRIGHT_KPH-1608CGCK.pdf, LatestRevisionDate=03.07.2017, Mounted=Yes, PackageDescription="SMT Green LED, Case 0603, Body L 1.6 x W 0.8mm H 0.65mm", Part Description="SMD Green LED, Case 1.6mmX0.8mm(0603), 0.65mm Thickness", Part Number=LED_KINGBRIGHT_KPH-1608CGCK, Pin Count=2, PressFit=No, Sense=No, SMD=Yes, Socket=No
Q1: library part XTAL_8.192MHZ_ABRACON_ABLS-8.192MHZ-B2-T, "Quartz Crystal", Manufacturer=ABRACON, Manufacturer Part Number=ABLS-8.192MHZ-B2-T, Author="CERN DEM MR", Bonding=No, ComponentHeight=4.2mm, Component Type=Standard, CreateDate=15.02.2018, HelpURL=\\cern.ch\dfs\Applications\Altium\Datasheets\XTAL_ABRACON_ABLS.pdf, LatestRevisionDate=15.02.2018, Mounted=Yes, PackageDescription="SMD Crystal, Body 11.40mm L X 4.70mm W X 4.20mm H, HC/49US (AT49) ALBS Series", Part Description="Tolerance: ± 20ppm, Stability: ± 50ppm, -20°C to +70°C, 18pF, 80 Ohms ESR, Low Profile Surface Mount Microprocessor Crystal, ABLS Series", Part Number=XTAL_8.192MHZ_ABRACON_ABLS-8.192MHZ-B2-T, Pin Count=2, PressFit=No, Sense=No, SMD=Yes, Socket=No
R1A R1B R2A R2B R4A R4B R5A R5B: library part R1206_470K_1%_0.25W_100PPM, "Resistor - 1%", Case=1206, Manufacturer=GENERIC, Manufacturer1 ComponentHeight=0.65mm, Manufacturer1 Example="NIC COMPONENT", Manufacturer1 Part Number=NRC12F4703TRF, Power=0.25W, Tolerance=±1%, Author="CERN DEM JLC", Component Type=Standard, CreateDate=03.12.2007, HelpURL=\\cern.ch\dfs\Applications\Altium\Datasheets\R1206_NIC_NRC.pdf, LatestRevisionDate=13.03.2008, Manufacturer Part Number=R1206_470K_1%_0.25W_100PPM, Mounted=Yes, Part Description="General Purpose Thick Film Chip Resistor", Part Number=R1206_470K_1%_0.25W_100PPM, Pin Count=2, PressFit=No, Sense=No, SMD=Yes, Socket=No, Status=Preferred, TC=±100ppm/°C
R3A R3B R10A R10B: library part R0402_100R_1%_0.0625W_100PPM, "Resistor - 1%", Case=0402, Manufacturer=GENERIC, Manufacturer1 ComponentHeight=0.4mm, Manufacturer1 Example="YAGEO PHYCOMP", Manufacturer1 Part Number=232270671001L, Power=0.0625W, Tolerance=±1%, Author="CERN DEM JLC", Component Type=Standard, CreateDate=03.12.2007, HelpURL=\\cern.ch\dfs\Applications\Altium\Datasheets\R0402_Phycomp_RC0402.pdf, LatestRevisionDate=17.10.2012, Manufacturer Part Number=R0402_100R_1%_0.0625W_100PPM, Mounted=Yes, Part Description="General Purpose Thick Film Chip Resistor", Part Number=R0402_100R_1%_0.0625W_100PPM, Pin Count=2, PressFit=No, Sense=No, SMD=Yes, Socket=No, Status="Not Recommended", TC=±100ppm/°C
R6: library part RES_1206, "SMD Resistor", Supplier Part Number 1=39K0871, Supplier 1=Newark
R6A R6B R7 R7A R7B R8A R8B R12A R12B R145: library part R0402_1K_1%_0.0625W_100PPM, "Resistor - 1%", Case=0402, Manufacturer=GENERIC, Manufacturer1 ComponentHeight=0.4mm, Manufacturer1 Example="YAGEO PHYCOMP", Manufacturer1 Part Number=232270671002L, Power=0.0625W, Tolerance=±1%, Author="CERN DEM JLC", Component Type=Standard, CreateDate=03.12.2007, HelpURL=\\cern.ch\dfs\Applications\Altium\Datasheets\R0402_Phycomp_RC0402.pdf, LatestRevisionDate=17.10.2012, Manufacturer Part Number=R0402_1K_1%_0.0625W_100PPM, Mounted=Yes, Part Description="General Purpose Thick Film Chip Resistor", Part Number=R0402_1K_1%_0.0625W_100PPM, Pin Count=2, PressFit=No, Sense=No, SMD=Yes, Socket=No, Status="Not Recommended", TC=±100ppm/°C
R8: library part R0402_100K_1%_0.0625W_100PPM, "Resistor - 1%", Case=0402, Manufacturer=GENERIC, Manufacturer1 ComponentHeight=0.4mm, Manufacturer1 Example="YAGEO PHYCOMP", Manufacturer1 Part Number=232270671004L, Power=0.0625W, Tolerance=±1%, Author="CERN DEM JLC", Component Type=Standard, CreateDate=03.12.2007, HelpURL=\\cern.ch\dfs\Applications\Altium\Datasheets\R0402_Phycomp_RC0402.pdf, LatestRevisionDate=17.10.2012, Manufacturer Part Number=R0402_100K_1%_0.0625W_100PPM, Mounted=Yes, Part Description="General Purpose Thick Film Chip Resistor", Part Number=R0402_100K_1%_0.0625W_100PPM, Pin Count=2, PressFit=No, Sense=No, SMD=Yes, Socket=No, Status="Not Recommended", TC=±100ppm/°C
R9: library part R0402_49R9_1%_0.0625W_100PPM, "Resistor - 1%", Case=0402, Manufacturer=GENERIC, Manufacturer1 ComponentHeight=0.4mm, Manufacturer1 Example="YAGEO PHYCOMP", Manufacturer1 Part Number="232270674999L or RC0402FR-0749R9L", Power=0.0625W, Tolerance=±1%, Author="CERN DEM JLC", Component Type=Standard, CreateDate=2012-10-24, HelpURL=\\cern.ch\dfs\Applications\Altium\Datasheets\R0402_Phycomp_RC0402.pdf, LatestRevisionDate=2012-10-24, Manufacturer Part Number=R0402_49R9_1%_0.0625W_100PPM, Mounted=Yes, Part Description="General Purpose Thick Film Chip Resistor", Part Number=R0402_49R9_1%_0.0625W_100PPM, Pin Count=2, SMD=Yes, Socket=No, Status="Not recommended", Table="Resistors SMD", TC=±100ppm/°C
R9A R9B R11A R11B: library part R0603_2R4_1%_0.1W_200PPM, "Resistor - 1%", Case=0603, Manufacturer=GENERIC, Manufacturer1 ComponentHeight=0.65mm, Manufacturer1 Example="YAGEO PHYCOMP", Manufacturer1 Part Number="232270462408L or RC0603FR-072R4L", Power=0.1W, Tolerance=±1%, Author="CERN DEM JLC", Component Type=Standard, CreateDate=03.12.2007, HelpURL=\\cern.ch\dfs\Applications\Altium\Datasheets\R0603_Tyco_RN73.pdf, LatestRevisionDate=17.10.2012, Manufacturer Part Number=R0603_2R4_1%_0.1W_200PPM, Mounted=Yes, Part Description="General Purpose Thick Film Chip Resistor", Part Number=R0603_2R4_1%_0.1W_200PPM, Pin Count=2, PressFit=No, Sense=No, SMD=Yes, Socket=No, Status=Preferred, TC=±200ppm/°C
R13A R13B R14A R14B: library part R0402_0R_JUMPER, "Resistor", Case=0402, Manufacturer=GENERIC, Manufacturer1 ComponentHeight=0.4mm, Manufacturer1 Example="YAGEO PHYCOMP", Manufacturer1 Part Number=232270591001L, Author="CERN DEM JLC", Component Type=Standard, CreateDate=03.12.2007, HelpURL=\\cern.ch\dfs\Applications\Altium\Datasheets\R0402_Phycomp_RC0402.pdf, LatestRevisionDate=17.10.2012, Manufacturer Part Number=R0402_0R_JUMPER, Mounted=Yes, Part Description="1A (0.05R Max DC Resistance) Zero Ohm Jumper", Part Number=R0402_0R_JUMPER, Pin Count=2, PressFit=No, Sense=No, SMD=Yes, Socket=No, Status="Not Recommended"
R15 R16 R17 R22 R23 R146: library part R0402_10K_1%_0.0625W_100PPM, "Resistor - 1%", Case=0402, Manufacturer=GENERIC, Manufacturer1 ComponentHeight=0.4mm, Manufacturer1 Example="YAGEO PHYCOMP", Manufacturer1 Part Number=232270671003L, Power=0.0625W, Tolerance=±1%, Author="CERN DEM JLC", Component Type=Standard, CreateDate=03.12.2007, HelpURL=\\cern.ch\dfs\Applications\Altium\Datasheets\R0402_Phycomp_RC0402.pdf, LatestRevisionDate=17.10.2012, Manufacturer Part Number=R0402_10K_1%_0.0625W_100PPM, Mounted=Yes, Part Description="General Purpose Thick Film Chip Resistor", Part Number=R0402_10K_1%_0.0625W_100PPM, Pin Count=2, PressFit=No, Sense=No, SMD=Yes, Socket=No, Status="Not Recommended", TC=±100ppm/°C
T1: "45V, 100mA PNP General Purpose Double Transistor", Case=SOT666, Manufacturer="NXP SEMICONDUCTORS", Author="CERN DEM JLC", Bonding=No, ComponentHeight=0.6mm, Component Type=Standard, CreateDate=01.12.2011, Device=BC857BV, HelpURL=\\cern.ch\dfs\Applications\Altium\Datasheets\BC857BV.pdf, LatestRevisionDate=01.12.2011, Manufacturer Part Number=BC857BV, Mounted=Yes, PackageDescription="SOTFL (SOT666), 0.50mm, Pitch; 6 Pin, 1.20mm W X 1.60mm L X 0.60mm H Body, IPC Medium Density", Part Description="-45V -100mA PNP General Purpose Double Transistor", Part Number=BC857BV, Pin Count=6, PressFit=No, Sense=No, SMD=Yes, Socket=No
T23: "N-CHANNEL MOSFET WITH DIODE", Case=SOT23-3, Manufacturer="ON SEMICONDUCTOR", Author="CERN DEM JLC", Bonding=No, ComponentHeight=1.11mm, Component Type=Standard, CreateDate=23.03.2009, Device=BSS138LT1G, HelpURL=\\cern.ch\dfs\Applications\Altium\Datasheets\BSS138LT1G.pdf, LatestRevisionDate=23.03.2009, Manufacturer Part Number=BSS138LT1G, Mounted=Yes, PackageDescription="SOT23 3-Leads, Pitch 0.95mm - Body 1.4x3mm, IPC Medium Density", Part Description="50V 200mA N-Channel Enhancement Mode Field-Effect Transistor", Part Number=BSS138LT1G, Pin Count=3, PressFit=No, Sense=No, SMD=Yes, Socket=No
TP1A TP1B TP2A TP2B TP3 TP4: library part SMD_PAD_1.27X1.27MM, Author="CERN DEM JLC", ComponentHeight=0mm, Component Type="Standard (No BOM)", CreateDate=12.01.2008, Family="Test Point", HelpURL=Undefined, LatestRevisionDate=12.01.2008, Mounted=No, PackageDescription="1.27mm x 1.27mm PCB Copper Area (SMD Test Point)", Part Description="1.27mm x 1.27mm PCB Copper Area (SMD Test Point)", Part Number=SMD_PAD_1.27X1.27MM, Pin Count=1, Sense=No, SMD=Yes, Socket=No, Status=None

## Via types
v1: diameter 0.5, hole 0.2, Top to Bot, tented both sides, 149 vias
v2: diameter 1.2, hole 0.8, Top to Bot, tented both sides, 2 vias

## Nets (pads, with @x,y where several pads share a name; then routed paths per layer and width w, separated by ;. In a path a pad name is that pad's centre, name@x,y a point inside that pad or via, vN(x,y) a via of type N, cw(c..) or ccw(c..) an arc to the next point about the centre after c; other vN are vias at no path point)
CLK_8.192: IC1A.22 IC1B.22 IC4.12 | length 54.4
  Top w0.152: v1(12.196,41.027) 14.027,41.027 v1(14.2,41.2) ; v1(12.5,54.5) 13.353,53.647 13.353,51.753 v1(13.3,51.7)
  Bot w0.152: IC1B.22@1.4,29.725 2.1,29.725 2.322,29.947 2.409,29.947 4.118,31.655 4.118,34.835 4.068,34.884 4.068,36.894 4.147,36.972 4.147,40.204 4.97,41.027 v1(12.196,41.027) ; IC4.12@9.25,53.35 9.247,53.353 9.247,54.238 9.512,54.503 12.497,54.503 v1(12.5,54.5) ; IC1A.22@11.8,29.725 12.5,29.725 12.722,29.947 12.809,29.947 14.518,31.655 14.518,34.835 14.279,35.074 14.279,38.926 14.084,39.12 14.084,41.084 v1(14.2,41.2) 14.084,41.316 14.084,42.06 13.65,42.495 13.65,44.361 13.933,44.644 13.933,45.667 13.55,46.05 13.55,46.7 13.55,46.766 13.416,46.9 13.416,50.854 13.3,50.97 v1(13.3,51.7)
CS0: IC1B.24 IC4.32 | length 23.1
  Top w0.152: v1(5.4,43.5) 5.4,43.129 5.6,42.929 v1(5.6,41.5)
  Bot w0.152: IC1B.24@1.4,31.025 2.1,31.025 2.322,31.247 2.409,31.247 3.838,32.676 3.838,34.719 3.789,34.769 3.789,37.009 3.867,37.088 3.867,40.32 5.047,41.5 v1(5.6,41.5) ; v1(5.4,43.5) 5.4,43.549 4.937,44.012 4.937,44.222 4.647,44.512 4.647,47.188 4.912,47.453 5.255,47.453 5.474,47.672 7.522,47.672 7.75,47.9 IC4.32@7.75,48.45
CS1: IC1A.24 IC4.19 | length 23.4
  Bot w0.152: IC1A.24@11.8,31.025 12.5,31.025 12.722,31.247 12.809,31.247 14.238,32.676 14.238,34.719 13.999,34.958 13.999,38.81 13.747,39.063 13.747,41.388 13.753,41.394 13.753,41.997 13.371,42.379 13.371,44.83 13.653,45.112 13.653,45.552 13.271,45.934 13.271,46.651 13.137,46.784 13.137,50.738 12.225,51.65 IC4.19@11.95,51.65
DEV_RESETn: IC4.25 R8.1 T23.1 | length 16.9
  Top w0.152: v1(11.9,45.3) 12.353,45.753 14.047,45.753 14.6,45.2 v1(14.7,45.2)
  Bot w0.152: IC4.25@11.25,48.45 11.25,48.215 11.318,48.147 11.494,48.147 11.903,47.738 11.903,46.438 12.153,46.188 12.153,45.812 11.966,45.625 11.966,45.366 v1(11.9,45.3) ; v1(14.7,45.2) 14.7,43.941 16.231,42.409 16.742,42.409 17.353,41.799 17.353,40.912 17.088,40.647 16.35,40.647 16.35,38.85 16.5,38.7 R8.1@17.33,38.7 R8.1@17.116,38.914